# EAGLE board Board (EAGLE 9.7.0)
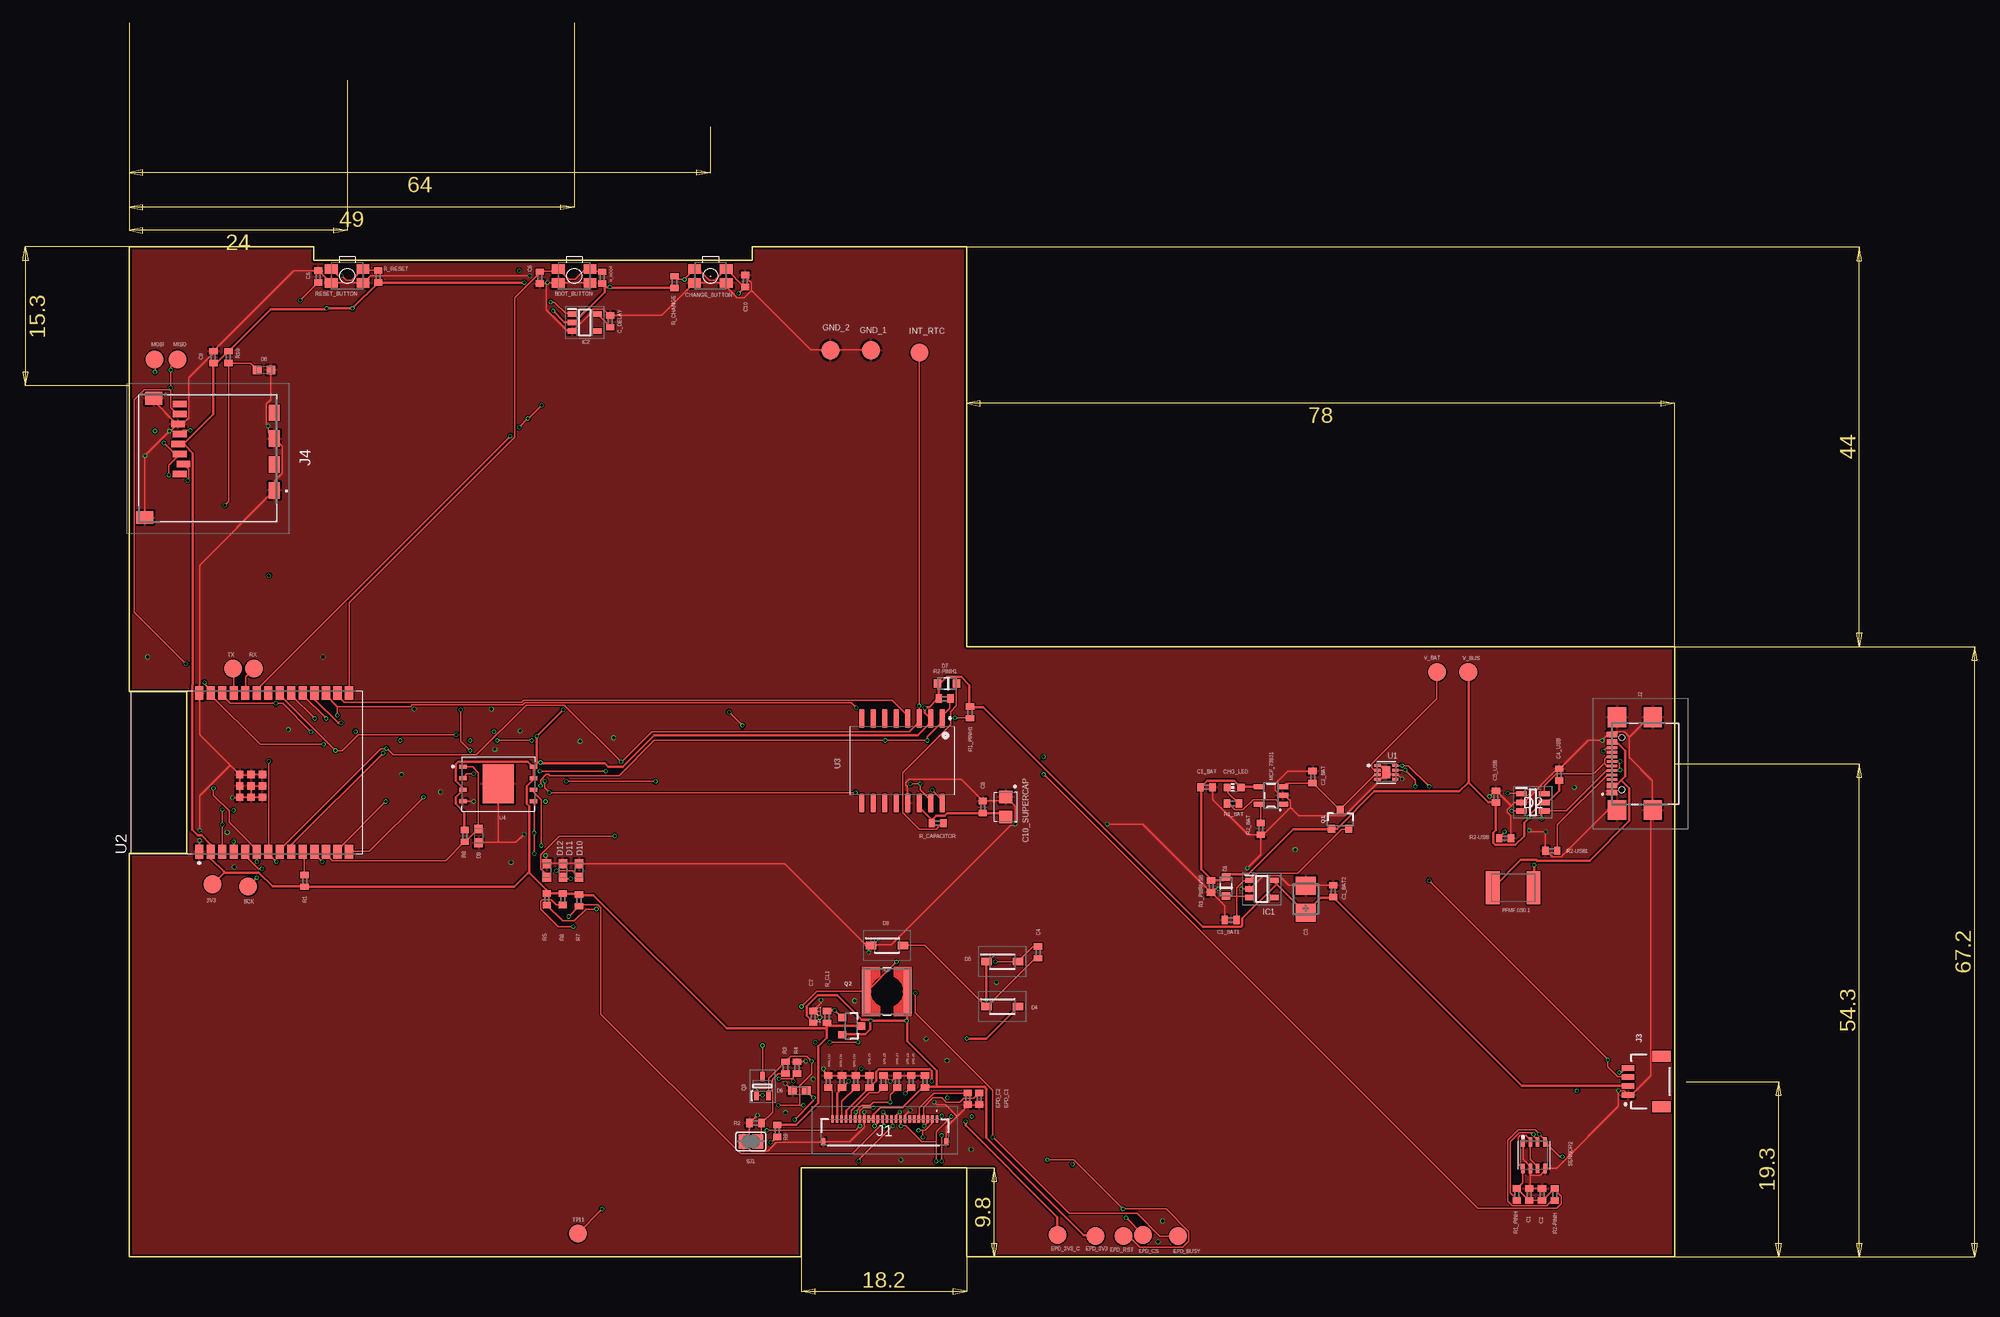
[diagram p0: board, top side]
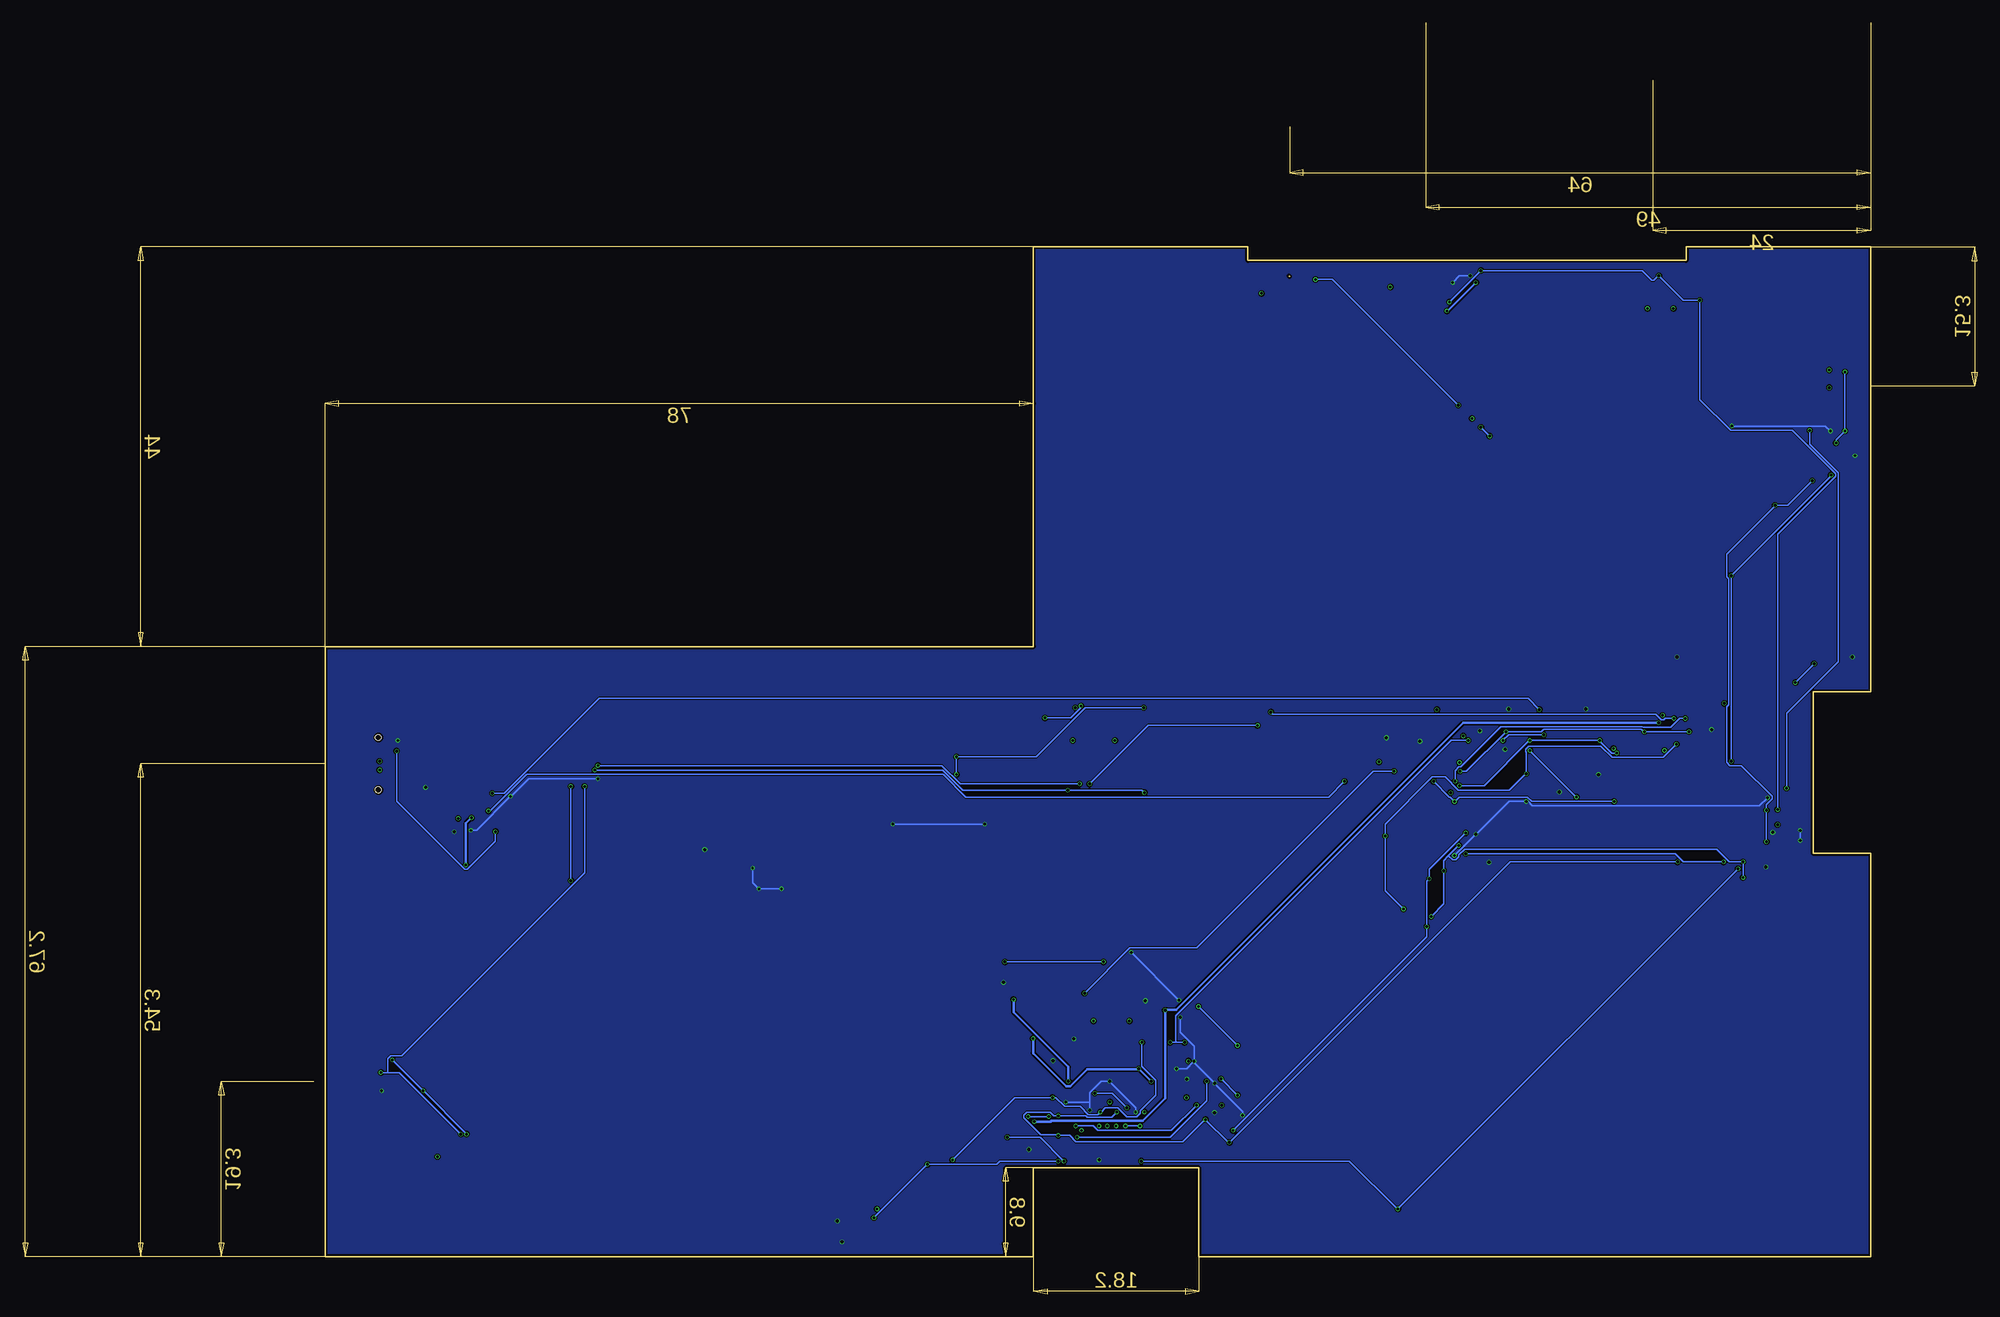
[diagram p1: board, bottom side, seen from below]

Size 170.2 x 111.2 mm. Coordinates in mm from the lower left corner, seen from the top.
Outline: 64.04,107.99 64,107.95
Outline: 6.35,44.45 0,44.45 0,0 74,0 74,9.8 92.2,9.8 92.2,0 170.2,0 170.2,67.2 92.2,67.2 92.2,111.2 68.58,111.2 68.58,109.72 20.32,109.72 20.32,111.2 0,111.2 0,62.23 6.35,62.23 6.35,44.45
Copper layers (1*16): Top 0.035mm / dielectric 1.6mm / Bottom 0.035mm
Design rules "jlcpcb-2layers.dru *": minimum track width 0.15mm, minimum drill 0.3mm, track to track 5mil, track to pad 5mil, pad to pad 5mil, via to via 5mil, smd to smd 5mil, copper to edge 0.2mm, drill to drill 6mil, minimum pad ring 10mil, minimum via ring 3mil, stop-mask expansion 4mil, vias tented up to drill 0mil, thermal gap 10mil
Net classes: 1 power: width 0.3 mm

## Footprints (pad centres in the part's own frame; a part is rotated, then mirrored left to right if it is on the bottom)
TP20R = smd 2 x 2: TP 0,0
MYBUTTON = smd 1.4 x 1.05: 1 1.75,0.75; 2 -1.75,0.75; 3 -1.75,-0.75; 4 1.75,-0.75
EAGLE-LTSPICE_C0402 = smd 0.7 x 0.9: 1 -0.65,0; 2 0.65,0
RCL_CT3528 = smd 2 x 2.2: + -1.5,0; - 1.5,0
CAPCP3225X100N = smd 1.4 x 1.4: 1 -1.1,0; 2 1.1,0
ADAFRUIT_CHIP-LED0603 = smd 0.8 x 0.8: A 0,-0.75; C 0,0.75
ESP32_WROVER_AVX---SD0805S020S1R0_AVX_SD0805S020S1R0_0 = smd 0.8 x 0.9: 1 -1.05,0; 2 1.05,0
SOT95P280X145-6N = smd 1.2 x 0.6: 1 -1.25,0.95; 2 -1.25,0; 3 -1.25,-0.95; 4 1.25,-0.95; 5 1.25,0; 6 1.25,0.95
SOD3716X135N = smd 1.15 x 0.8: 1 -1.75,0; 2 1.75,0
DIOC1608X36N = smd 0.97 x 0.94: 1 -0.75,0; 2 0.75,0
SOT95P280X120-5N = smd 0.9 x 0.6: 1 -1.4,0.95; 2 -1.4,0; 3 -1.4,-0.95; 4 1.4,-0.95; 5 1.4,0.95
SOT95P280X125-5N = smd 0.9 x 0.6: 1 -1.4,0.95; 2 -1.4,0; 3 -1.4,-0.95; 4 1.4,-0.95; 5 1.4,0.95
FH34SRJ24S05SH99 = smd 0.3 x 0.8: 1 5.75,1.45; 2 5.25,1.45; 3 4.75,1.45; 4 4.25,1.45; 5 3.75,1.45; 6 3.25,1.45; 7 2.75,1.45; 8 2.25,1.45; 9 1.75,1.45; 10 1.25,1.45; 11 0.75,1.45; 12 0.25,1.45; 13 -0.25,1.45; 14 -0.75,1.45; 15 -1.25,1.45; 16 -1.75,1.45; 17 -2.25,1.45; 18 -2.75,1.45; 19 -3.25,1.45; 20 -3.75,1.45; 21 -4.25,1.45; 22 -4.75,1.45; 23 -5.25,1.45; 24 -5.75,1.45 | smd 0.4 x 0.8: MP1 6.75,-1.05; MP2 -6.75,-1.05
SAMACSYS_PARTS_USB4110GFA = smd 0.3 x 1.15: A1 -3.35,3.678; A4 -2.55,3.678; A5 -1.25,3.678; A6 -0.25,3.678; A7 0.25,3.678; A8 1.25,3.678; A9 2.55,3.678; A12 3.35,3.678; B1 3.05,3.678; B4 2.25,3.678; B5 1.75,3.678; B6 0.75,3.678; B7 -0.75,3.678; B8 -1.75,3.678; B9 -2.25,3.678; B12 -3.05,3.678 | smd 2.18 x 2: MP1 -5.11,-0.827; MP2 5.11,-0.827; MP3 -5.11,3.103; MP4 5.11,3.103 | hole 0.65: -2.89,2.603; 2.89,2.603
JST04_1MM_RA = smd 0.6 x 1.35: 1 -1.5,0; 2 -0.5,0; 3 0.5,0; 4 1.5,0 | smd 1.2 x 2: NC1 2.8,-3.675; NC2 -2.8,-3.675
112ATAARR03ATTEND = smd 1.8 x 1.2: G1 10.6,10.4; G2 4.9,10.4; S1 7.75,10.4; S2 2.05,10.4 | smd 1.4 x 1.9: G3 13.6,-3.85; G4 0.45,-2.85 | smd 0.7 x 1.5: P1 8.8,0; P2 7.7,0.4; P3 6.6,0; P4 5.5,-0.2; P5 4.4,0; P6 3.3,-0.2; P7 2.2,0; P8 1.1,0
IND_4828-WE-TPC_WRE = smd 0.889 x 4.826: 1 -2.286,0; 2 2.286,0
ESP32_WROVER_SPARKFUN-IC-POWER_SOT23-5 = smd 0.55 x 1.2: 1 -0.95,-1.3; 2 0,-1.3; 3 0.95,-1.3; 4 0.95,1.3; 5 -0.95,1.3
ESP32C6_VARISTOR_CT/CN1812 = smd 1.5 x 3.6: 1 -2.25,0; 2 2.25,0
ESP32_WROVER_SPARKFUN-DISCRETESEMI_SOT23-3 = smd 0.8 x 0.9: 1 -0.95,-1; 2 0.95,-1; 3 0,1.1
SOT65P210X110-3N = smd 1.05 x 0.5: 1 -1.05,0.65; 2 -1.05,-0.65; 3 1.05,0
ESP32_WROVER_EAGLE-LTSPICE_R0402 = smd 0.7 x 0.9: 1 -0.65,0; 2 0.65,0
ESP32_WROVER_BME680_PSON80P300X300X100-8N = smd 1.016 x 0.5: 1 1.458,1.2; 2 1.458,0.4; 3 1.458,-0.4; 4 1.458,-1.2; 5 -1.458,-1.22; 6 -1.458,-0.4; 7 -1.458,0.4; 8 -1.458,1.2
SJ = smd 1.168 x 1.6: 1 -0.762,0; 2 0.762,0
SON50P200X200X80-9N = smd 0.76 x 0.27: 1 -0.985,0.75; 2 -0.985,0.25; 3 -0.985,-0.25; 4 -0.985,-0.75; 5 0.985,-0.75; 6 0.985,-0.25; 7 0.985,0.25; 8 0.985,0.75 | smd 0.9 x 1.3: 9 0,0
XCVR_ESP32-C6-WROOM-1-N8 = smd 1.5 x 0.9: 1 -8.75,5.26; 2 -8.75,3.99; 3 -8.75,2.72; 4 -8.75,1.45; 5 -8.75,0.18; 6 -8.75,-1.09; 7 -8.75,-2.36; 8 -8.75,-3.63; 9 -8.75,-4.9; 10 -8.75,-6.17; 11 -8.75,-7.44; 12 -8.75,-8.71; 13 -8.75,-9.98; 14 -8.75,-11.25; 15 8.75,-11.25; 16 8.75,-9.98; 17 8.75,-8.71; 18 8.75,-7.44; 19 8.75,-6.17; 20 8.75,-4.9; 21 8.75,-3.63; 22 8.75,-2.36; 23 8.75,-1.09; 24 8.75,0.18; 25 8.75,1.45; 26 8.75,2.72; 27 8.75,3.99; 28 8.75,5.26 | smd 0.8 x 0.8: 29_1 -2.755,0.79; 29_2 -1.505,0.79; 29_3 -0.255,0.79; 29_4 -2.755,-0.46; 29_5 -1.505,-0.46; 29_6 -0.255,-0.46; 29_7 -2.755,-1.71; 29_8 -1.505,-1.71; 29_9 -0.255,-1.71
SOIC127P1032X265-16N = smd 2.05 x 0.59: 1 -4.655,4.445; 2 -4.655,3.175; 3 -4.655,1.905; 4 -4.655,0.635; 5 -4.655,-0.635; 6 -4.655,-1.905; 7 -4.655,-3.175; 8 -4.655,-4.445; 9 4.655,-4.445; 10 4.655,-3.175; 11 4.655,-1.905; 12 4.655,-0.635; 13 4.655,0.635; 14 4.655,1.905; 15 4.655,3.175; 16 4.655,4.445
SON127P600X800X80-9N = smd 0.94 x 0.44: 1 -3.895,1.905; 2 -3.895,0.635; 3 -3.895,-0.635; 4 -3.895,-1.905; 5 3.895,-1.905; 6 3.895,-0.635; 7 3.895,0.635; 8 3.895,1.905 | smd 3.4 x 4.3: 9 0,0

## Placement (x,y rotation side)
3V3  TPTP20R  [TP20R]  9.14,41.02 0 top
BOOT_BUTTON  BUTTON_CUSYOMV1  [MYBUTTON]  49,108 180 top
C1  100nF  [EAGLE-LTSPICE_C0402]  154.18,6.86 90 top
C1_BAT  4.7uF  [EAGLE-LTSPICE_C0402]  118.62,51.69 0 top
C1_BAT1  4.7uF  [EAGLE-LTSPICE_C0402]  121.28,37.08 180 top
C1_BAT2  4.7uF  [EAGLE-LTSPICE_C0402]  132.59,40.26 90 top
C2  100nF  [EAGLE-LTSPICE_C0402]  155.57,6.86 90 top
C2_BAT  4.7uF  [EAGLE-LTSPICE_C0402]  130.3,52.83 90 top
C3  100uF  [RCL_CT3528]  129.54,39.37 90 top
C4  4.7uF/25V  [EAGLE-LTSPICE_C0402]  100.08,33.53 90 top
C4_USB  100nF  [EAGLE-LTSPICE_C0402]  157.48,53.09 90 top
C5  1uF  [EAGLE-LTSPICE_C0402]  20.83,107.95 90 top
C5_USB  4.7uF  [EAGLE-LTSPICE_C0402]  150.5,50.67 90 top
C6  100nF  [EAGLE-LTSPICE_C0402]  45.21,107.81 270 top
C7  10uF  [EAGLE-LTSPICE_C0402]  75.31,26.42 90 top
C8  100nF  [EAGLE-LTSPICE_C0402]  93.98,49.53 90 top
C9  100nF  [EAGLE-LTSPICE_C0402]  9.27,99.06 90 top
C10  100nF  [EAGLE-LTSPICE_C0402]  67.82,107.44 90 top
C10_SUPERCAP  CPH3225A  [CAPCP3225X100N]  96.52,49.53 270 top
C_DELAY  100nF  [EAGLE-LTSPICE_C0402]  52.96,103 90 top
CHANGE_BUTTON  BUTTON_CUSYOMV1  [MYBUTTON]  64,108 180 top
CHG_LED  [ADAFRUIT_CHIP-LED0603]  121.67,51.69 90 top
D1  ESP32_WROVER_AVX---SD0805S020S1R0_AVX_SD0805S020S1R0_0_0AVX_SD0805S020S1R0_0_0  [ESP32_WROVER_AVX---SD0805S020S1R0_AVX_SD0805S020S1R0_0]  120.78,40.77 90 top
D2  USBLC6-2SC6Y  [SOT95P280X145-6N]  154.56,50.04 0 top
D3  MBR0530  [SOD3716X135N]  83.44,34.29 0 top
D4  MBR0530  [SOD3716X135N]  96.14,27.56 0 top
D5  MBR0530  [SOD3716X135N]  96.14,32.51 0 top
D6  PGB1010603MR  [DIOC1608X36N]  73.79,18.29 0 top
D7  ESP32_WROVER_AVX---SD0805S020S1R0_AVX_SD0805S020S1R0_0_0AVX_SD0805S020S1R0_0_0  [ESP32_WROVER_AVX---SD0805S020S1R0_AVX_SD0805S020S1R0_0]  90.04,63.12 180 top
D8  PGB1010603MR  [DIOC1608X36N]  14.86,97.66 180 top
D9  PGB1010603MR  [DIOC1608X36N]  38.48,46.35 90 top
D10  PGB1010603MR  [DIOC1608X36N]  49.53,42.55 270 top
D11  PGB1010603MR  [DIOC1608X36N]  47.75,42.55 270 top
D12  PGB1010603MR  [DIOC1608X36N]  45.97,42.55 270 top
EPD_3V3  TPTP20R  [TP20R]  106.43,2.29 0 top
EPD_3V3_C  TPTP20R  [TP20R]  102.23,2.41 0 top
EPD_BUSY  TPTP20R  [TP20R]  115.46,2.27 0 top
EPD_C1  1uF/50V  [EAGLE-LTSPICE_C0402]  93.6,17.4 270 top
EPD_C2  1uF/50V  [EAGLE-LTSPICE_C0402]  92.33,17.4 270 top
EPD_C5  0.1uF/50V  [EAGLE-LTSPICE_C0402]  87.63,19.3 90 top
EPD_C6  1uF/50V  [EAGLE-LTSPICE_C0402]  86.11,19.3 90 top
EPD_C7  1uF/50V  [EAGLE-LTSPICE_C0402]  84.58,19.3 90 top
EPD_C8  1uF/50V  [EAGLE-LTSPICE_C0402]  83.06,19.3 90 top
EPD_C9  1uF/50V  [EAGLE-LTSPICE_C0402]  81.52,19.3 90 top
EPD_C10  1uF/50V  [EAGLE-LTSPICE_C0402]  79.99,19.3 90 top
EPD_C11  1uF/50V  [EAGLE-LTSPICE_C0402]  78.49,19.3 90 top
EPD_C12  1uF/50V  [EAGLE-LTSPICE_C0402]  76.96,19.3 90 top
EPD_CS  TPTP20R  [TP20R]  111.63,2.41 0 top
EPD_RST  TPTP20R  [TP20R]  109.47,2.29 0 top
GND_1  TPTP20R  [TP20R]  81.66,99.82 180 top
GND_2  TPTP20R  [TP20R]  77.22,99.82 0 top
IC1  XC6220A331MR-G  [SOT95P280X120-5N]  124.71,40.51 0 top
IC2  BD5229G-TR  [SOT95P280X125-5N]  50.16,102.87 0 top
INT_RTC  TPTP20R  [TP20R]  87,99.57 0 top
J1  FH34SRJ-24S-0.5SH_99_  [FH34SRJ24S05SH99]  83.19,13.72 0 top
J2  SAMACSYS_PARTS_USB4110-GF-ACPLM  [SAMACSYS_PARTS_USB4110GFA]  166.94,54.3 90 top
J3  QWIIC_RIGHT_ANGLE  [JST04_1MM_RA]  165.05,19.3 90 top
J4  112A-TAAR-R03_ATTEND  [112ATAARR03ATTEND]  5.56,95 270 top
L1  68uH  [IND_4828-WE-TPC_WRE]  83.44,29.21 0 top
MCP_73831  ESP32_WROVER_SPARKFUN-IC-POWER_MCP73831  [ESP32_WROVER_SPARKFUN-IC-POWER_SOT23-5]  125.73,50.8 90 top
MISO  TPTP20R  [TP20R]  5.33,98.81 0 top
MOSI  TPTP20R  [TP20R]  2.79,98.81 0 top
PFMF.050.1  ESP32C6_VARISTORCN1812  [ESP32C6_VARISTOR_CT/CN1812]  152.4,40.64 0 top
Q1  20V/4.2A/52mΩ/1.4W  [ESP32_WROVER_SPARKFUN-DISCRETESEMI_SOT23-3]  133.35,48.13 0 top
Q2  20V/4.2A/52mΩ/1.4W  [ESP32_WROVER_SPARKFUN-DISCRETESEMI_SOT23-3]  79.5,25.4 270 top
Q3  SI1308EDL-T1-GE3  [SOT65P210X110-3N]  69.72,18.8 90 top
R1  10K  [ESP32_WROVER_EAGLE-LTSPICE_R0402]  19.3,41.4 90 top
R1_BAT  200  [ESP32_WROVER_EAGLE-LTSPICE_R0402]  121.54,49.91 0 top
R1_PINH  10K  [ESP32_WROVER_EAGLE-LTSPICE_R0402]  152.78,6.86 90 top
R1_PINH1  10K  [ESP32_WROVER_EAGLE-LTSPICE_R0402]  92.58,59.94 90 top
R1_PWRUSB  100K  [ESP32_WROVER_EAGLE-LTSPICE_R0402]  119.13,40.77 90 top
R2  2.2  [ESP32_WROVER_EAGLE-LTSPICE_R0402]  68.96,14.73 0 top
R2-PINH  10K  [ESP32_WROVER_EAGLE-LTSPICE_R0402]  156.97,6.86 90 top
R2-PINH1  10K  [ESP32_WROVER_EAGLE-LTSPICE_R0402]  89.79,61.47 180 top
R2-USB  5K1  [ESP32_WROVER_EAGLE-LTSPICE_R0402]  151.51,46.1 0 top
R2-USB1  5K1  [ESP32_WROVER_EAGLE-LTSPICE_R0402]  156.59,44.7 0 top
R2_BAT  2K  [ESP32_WROVER_EAGLE-LTSPICE_R0402]  124.59,47.12 90 top
R3  0.47  [ESP32_WROVER_EAGLE-LTSPICE_R0402]  72.26,20.83 270 top
R4  10K  [ESP32_WROVER_EAGLE-LTSPICE_R0402]  73.53,20.83 90 top
R5  10K  [ESP32_WROVER_EAGLE-LTSPICE_R0402]  45.97,39.37 90 top
R6  10K  [ESP32_WROVER_EAGLE-LTSPICE_R0402]  47.75,39.37 90 top
R7  10K  [ESP32_WROVER_EAGLE-LTSPICE_R0402]  49.53,39.24 90 top
R8  10K  [ESP32_WROVER_EAGLE-LTSPICE_R0402]  36.96,46.35 90 top
R9  10K  [ESP32_WROVER_EAGLE-LTSPICE_R0402]  71.37,13.84 90 top
R10  10K  [ESP32_WROVER_EAGLE-LTSPICE_R0402]  10.92,99.06 90 top
R_BOOT  10K  [ESP32_WROVER_EAGLE-LTSPICE_R0402]  52.07,107.82 90 top
R_CAPACITOR  15  [ESP32_WROVER_EAGLE-LTSPICE_R0402]  89.03,47.75 0 top
R_CHANGE  10K  [ESP32_WROVER_EAGLE-LTSPICE_R0402]  60.04,107.31 90 top
R_CL1  10K  [ESP32_WROVER_EAGLE-LTSPICE_R0402]  76.83,26.42 90 top
R_RESET  10K  [ESP32_WROVER_EAGLE-LTSPICE_R0402]  27.43,107.95 90 top
RESET_BUTTON  BUTTON_CUSYOMV1  [MYBUTTON]  24,108 180 top
RX  TPTP20R  [TP20R]  13.72,64.77 0 top
SCK  TPTP20R  [TP20R]  13.08,40.77 0 top
SENSOR2  ESP32_WROVER_BME680_BME680  [ESP32_WROVER_BME680_PSON80P300X300X100-8N]  154.69,11.18 90 top
SJ1  [SJ]  68.45,12.7 0 top
TP11  TPTP20R  [TP20R]  49.4,2.54 0 top
TX  TPTP20R  [TP20R]  11.43,64.77 0 top
U1  MAX17048G+T10  [SON50P200X200X80-9N]  138.43,53.34 0 top
U2  ESP32-C6-WROOM-1-N8  [XCVR_ESP32-C6-WROOM-1-N8]  12.95,53.35 90 top
U3  DS3231SN#  [SOIC127P1032X265-16N]  85.09,54.61 270 top
U4  W25Q512JVEIQ  [SON127P600X800X80-9N]  40.64,52.07 0 top
V_BAT  TPTP20R  [TP20R]  144.02,64.39 180 top
V_BUS  TPTP20R  [TP20R]  147.45,64.39 0 top

## Library data of the parts
3V3 BOOT_BUTTON CHANGE_BUTTON CHG_LED EPD_3V3 EPD_3V3_C EPD_BUSY EPD_CS EPD_RST GND_1 GND_2 INT_RTC J2 MISO MOSI PFMF.050.1 RESET_BUTTON RX SCK SJ1 TP11 TX V_BAT V_BUS = DeskAssistant v19 v1
C1 C1_BAT C1_BAT1 C1_BAT2 C2 C2_BAT C4 C4_USB C5 C5_USB C6-C10 C_DELAY EPD_C1 EPD_C2 EPD_C5-EPD_C12 = DeskAssistant v19 v1; SPICEMODEL: NONE; SPICEPREFIX: C
C3 = DeskAssistant v19 v1; SPICEPREFIX: C
C10_SUPERCAP = DeskAssistant v19 v1; AVAILABILITY: Not in stock; CHECK_PRICES: https://www.snapeda.com/parts/CPH3225A/Seiko+Instruments/view-part/?ref=eda; DESCRIPTION: 11 mF (EDLC) Supercapacitor 3.3 V 1210 (3225 Metric) - -; MF: Seiko Instruments; MP: CPH3225A; PACKAGE: 1210 Seiko; PRICE: None; PURCHASE-URL: https://www.snapeda.com/api/url_track_click_mouser/?unipart_id=562593&manufacturer=Seiko Instruments&part_name=CPH3225A&search_term=None; SNAPEDA_LINK: https://www.snapeda.com/parts/CPH3225A/Seiko+Instruments/view-part/?ref=snap
D1 D7 = DeskAssistant v19 v1; CENTROID_NOT_SPECIFIED: No; DATASHEET: http://datasheets.avx.com/schottky.pdf; DIGIKEY_DESCRIPTION: DIODE SCHOTTKY 20V 1A 0805; DIGIKEY_PART_NUMBER: 478-7800-1-ND; LEAD_FREE: yes; MF: AVX; MOUSER_PART_NUMBER: 581-SD0805S020S1R0; PACKAGE: 0805 (2012 metric); PREFIX: D; ROHS: yes; TEMPERATURE_RANGE_HIGH: +125°C; TEMPERATURE_RANGE_LOW: -55°C
D2 = DeskAssistant v19 v1; AVAILABILITY: In Stock; CHECK_PRICES: https://www.snapeda.com/parts/USBLC6-2SC6Y/STMicroelectronics/view-part/?ref=eda; DESCRIPTION: 17V Clamp 5A (8/20µs) Ipp Tvs Diode Surface Mount SOT-23-6; MF: STMicroelectronics; MP: USBLC6-2SC6Y; PACKAGE: SOT-23-6 STMicroelectronics; PRICE: None; SNAPEDA_LINK: https://www.snapeda.com/parts/USBLC6-2SC6Y/STMicroelectronics/view-part/?ref=snap
D3-D5 = DeskAssistant v19 v1; AVAILABILITY: In Stock; CHECK_PRICES: https://www.snapeda.com/parts/MBR0530/Onsemi/view-part/?ref=eda; DESCRIPTION: Diode Schottky 30 V 500mA Surface Mount SOD-123; MF: ON Semiconductor; MP: MBR0530; PACKAGE: SOD-123-2 ON Semiconductor; PRICE: None; PURCHASE-URL: https://www.snapeda.com/api/url_track_click_mouser/?unipart_id=179458&manufacturer=ON Semiconductor&part_name=MBR0530&search_term=None; SNAPEDA_LINK: https://www.snapeda.com/parts/MBR0530/Onsemi/view-part/?ref=snap
D6 D8-D12 = DeskAssistant v19 v1; AVAILABILITY: In Stock; CHECK_PRICES: https://www.snapeda.com/parts/PGB1010603MR/Littelfuse/view-part/?ref=eda; DESCRIPTION: 150V (Typ) Clamp - Ipp Tvs Diode Surface Mount 0603 (1608 Metric); MF: Littelfuse Inc.; MP: PGB1010603MR; PACKAGE: 0603 Littelfuse Inc.; PRICE: None; PURCHASE-URL: https://www.snapeda.com/api/url_track_click_mouser/?unipart_id=5659453&manufacturer=Littelfuse Inc.&part_name=PGB1010603MR&search_term=None; SNAPEDA_LINK: https://www.snapeda.com/parts/PGB1010603MR/Littelfuse/view-part/?ref=snap
IC1 = DeskAssistant v19 v1; DESCRIPTION: LDO Voltage Regulators; HEIGHT: 1.2mm; MANUFACTURER_NAME: Torex; MANUFACTURER_PART_NUMBER: XC6220A331MR-G; MOUSER_PART_NUMBER: 865-XC6220A331MR-G; MOUSER_PRICE-STOCK: https://www.mouser.co.uk/ProductDetail/Torex-Semiconductor/XC6220A331MR-G?qs=AsjdqWjXhJ8ZSWznL1J0gg%3D%3D
IC2 = DeskAssistant v19 v1; DESCRIPTION: Voltage Detector with Adjustable Delay Time: CMOS processes are utilized to develop high precision, low current consumption CMOS reset ICs that allow arbitrary setting of the delay time. The extensive lineup includes both Nch Open Drain and CMOS output types in a wide range of detection voltages (from 2.3V to 6.0V, in 0.1V steps), enabling selection of the ideal solution based on customer requirements. In addition, the entire series is of course both lead-free and RoHS-compliant.; HEIGHT: 1.25mm; MANUFACTURER_NAME: ROHM Semiconductor; MANUFACTURER_PART_NUMBER: BD5229G-TR; MOUSER_PART_NUMBER: 755-BD5229G-TR; MOUSER_PRICE-STOCK: https://www.mouser.co.uk/ProductDetail/ROHM-Semiconductor/BD5229G-TR?qs=4kLU8WoGk0vvnhrrYwdszw%3D%3D
J1 = DeskAssistant v19 v1; DESCRIPTION: 24 Position FFC, FPC Connector Contacts, Top and Bottom 0.020" (0.50mm) Surface Mount, Right Angle; HEIGHT: 1.1mm; MANUFACTURER_NAME: Hirose; MANUFACTURER_PART_NUMBER: FH34SRJ-24S-0.5SH(99); MOUSER_PART_NUMBER: 798-FH34SRJ24S05SH99; MOUSER_PRICE-STOCK: https://www.mouser.co.uk/ProductDetail/Hirose-Connector/FH34SRJ-24S-0.5SH99?qs=vcbW%252B4%252BSTIpKBl5ap9J8Fw%3D%3D
J3 = DeskAssistant v19 v1; PROD_ID: CONN-13694
J4 = DeskAssistant v19 v1; DESCRIPTION: Micro SD Card Socket, Push-Push Type, Top Mount, SMT, H=1.83mm, 10u; HEIGHT: 1.9mm; MANUFACTURER_NAME: ATTEND; MANUFACTURER_PART_NUMBER: 112A-TAAR-R03 ATTEND
L1 = DeskAssistant v19 v1; COPYRIGHT: Copyright (C) 2024 Ultra Librarian. All rights reserved.; MANUFACTURER_PART_NUMBER: 744043680; MFR_NAME: Wurth Electronics
MCP_73831 = DeskAssistant v19 v1; PROD_ID: IC-09995
Q1 Q2 = DeskAssistant v19 v1; PROD_ID: TRAN-14388
Q3 = DeskAssistant v19 v1; AVAILABILITY: In Stock; CHECK_PRICES: https://www.snapeda.com/parts/SI1308EDL-T1-GE3/Vishay+Siliconix/view-part/?ref=eda; DESCRIPTION: Si1308EDL-T1-GE3 N-channel MOSFET Transistor, 1.5 A, 30 V, 3-Pin SC-70 | Siliconix / Vishay SI1308EDL-T1-GE3; MF: Vishay Siliconix; MP: SI1308EDL-T1-GE3; PACKAGE: SOT-323 Vishay Semiconductor; PRICE: None; PURCHASE-URL: https://www.snapeda.com/api/url_track_click_mouser/?unipart_id=274603&manufacturer=Vishay Siliconix&part_name=SI1308EDL-T1-GE3&search_term=None; SNAPEDA_LINK: https://www.snapeda.com/parts/SI1308EDL-T1-GE3/Vishay+Siliconix/view-part/?ref=snap
R1 R1_BAT R1_PINH R1_PINH1 R1_PWRUSB R2 R2-PINH R2-PINH1 R2-USB R2-USB1 R2_BAT R3-R10 R_BOOT R_CAPACITOR R_CHANGE R_CL1 R_RESET = DeskAssistant v19 v1; SPICEMODEL: NONE; SPICEPREFIX: R
SENSOR2 = DeskAssistant v19 v1; AVAILABILITY: Unavailable; DESCRIPTION: Integrated Environmental Unit; MF: Bosch Sensortec; MP: BME680; PACKAGE: LGA-8 Bosch Tools; PRICE: None
U1 = DeskAssistant v19 v1; AVAILABILITY: In Stock; CHECK_PRICES: https://www.snapeda.com/parts/MAX17048G+T10/Analog+Devices/view-part/?ref=eda; DESCRIPTION: 3µA 1-Cell/2-Cell Fuel Gauge with ModelGauge; MF: Analog Devices; MP: MAX17048G+T10; PACKAGE: TDFN-8 Maxim; PRICE: None; PURCHASE-URL: https://www.snapeda.com/api/url_track_click_mouser/?unipart_id=329239&manufacturer=Analog Devices&part_name=MAX17048G+T10&search_term=None; SNAPEDA_LINK: https://www.snapeda.com/parts/MAX17048G+T10/Analog+Devices/view-part/?ref=snap
U2 = DeskAssistant v19 v1; AVAILABILITY: In Stock; CHECK_PRICES: https://www.snapeda.com/parts/ESP32-C6-WROOM-1-N8/Espressif+Systems/view-part/?ref=eda; DESCRIPTION: Multiprotocol Modules ESP32-C6 module, Wi-Fi 6 in 2.4 GHz band, Bluetooth 5, Zigbee 3.0 and Thread. ESP34-WROOM Compatible - ENGINEERING SAMPLE; MF: Espressif Systems; MP: ESP32-C6-WROOM-1-N8; PACKAGE: None; PRICE: None; SNAPEDA_LINK: https://www.snapeda.com/parts/ESP32-C6-WROOM-1-N8/Espressif+Systems/view-part/?ref=snap
U3 = DeskAssistant v19 v1; AVAILABILITY: In Stock; CHECK_PRICES: https://www.snapeda.com/parts/DS3231SN%23/Analog+Devices/view-part/?ref=eda; DESCRIPTION: Extremely Accurate I²C-Integrated RTC/TCXO/Crystal; MF: Analog Devices; MP: DS3231SN#; PACKAGE: SOIC-16 Maxim; PRICE: None; PURCHASE-URL: https://www.snapeda.com/api/url_track_click_mouser/?unipart_id=99048&manufacturer=Analog Devices&part_name=DS3231SN#&search_term=None; SNAPEDA_LINK: https://www.snapeda.com/parts/DS3231SN%23/Analog+Devices/view-part/?ref=snap
U4 = DeskAssistant v19 v1; AVAILABILITY: In Stock; CHECK_PRICES: https://www.snapeda.com/parts/W25Q512JVEIQ/Winbond+Electronics/view-part/?ref=eda; DESCRIPTION: FLASH - NOR Memory IC 512Mb (64M x 8) SPI - Quad I/O 133 MHz 8-WSON (8x6); MF: Winbond Electronics; MP: W25Q512JVEIQ; PACKAGE: Package; PRICE: None; SNAPEDA_LINK: https://www.snapeda.com/parts/W25Q512JVEIQ/Winbond+Electronics/view-part/?ref=snap

## Nets
3V3 [power]: 3V3.TP C1_BAT2.1 C3.+ C9.1 D7.2 IC1.5 IC2.2 J3.2 J4.P4 Q2.3 R1.1 R1_PINH1.2 R2-PINH1.2 R5.2 R6.2 R7.2 R8.2 R9.2 R10.2 R_BOOT.1 R_CHANGE.1 R_CL1.1 R_RESET.1 U2.2 U3.2 U4.3 U4.7 U4.8
32KHZ: R2-PINH1.1 U2.9 U3.1
DN: D2.4 J2.A7 J2.B7
DP: D2.6 J2.A6 J2.B6
EPD_3V3 [power]: C7.1 EPD_3V3.TP EPD_C5.1 J1.15 J1.16 L1.2 Q2.2
EPD_3V3_C [power]: EPD_3V3_C.TP Q2.1 R_CL1.2 U2.18
EPD_BUSY: EPD_BUSY.TP J1.9 U2.26
EPD_CS: D6.2 EPD_CS.TP J1.12 R9.1 U2.11
EPD_DC: J1.11 TP11.TP U2.5
EPD_RST: EPD_RST.TP J1.10 U2.21
FLASH_CS: D9.2 R8.1 U2.12 U4.1
GDR: J1.2 Q3.1 R4.1
GND: BOOT_BUTTON.1 BOOT_BUTTON.2 C1.2 C1_BAT1.2 C1_BAT2.2 C1_BAT.2 C2.2 C2_BAT.2 C3.- C4_USB.2 C5.2 C5_USB.2 C6.2 C7.2 C8.2 C9.2 C10.2 C10_SUPERCAP.1 C_DELAY.2 CHANGE_BUTTON.1 CHANGE_BUTTON.2 D2.2 D3.1 D6.1 D8.1 D9.1 D10.1 D11.1 D12.1 EPD_C1.2 EPD_C2.2 EPD_C5.2 EPD_C6.2 EPD_C7.2 EPD_C8.2 EPD_C9.2 EPD_C10.2 EPD_C11.2 EPD_C12.2 GND_1.TP GND_2.TP IC1.2 IC2.3 J1.8 J1.17 J1.MP1 J1.MP2 J2.A1 J2.A12 J2.B1 J2.B12 J2.MP1 J2.MP2 J2.MP3 J2.MP4 J3.1 J4.G1 J4.G2 J4.G3 J4.G4 J4.P6 MCP_73831.2 R1_PWRUSB.1 R2-USB1.1 R2-USB.2 R2.1 R2_BAT.1 R4.2 RESET_BUTTON.1 RESET_BUTTON.2 SENSOR2.1 SENSOR2.5 SENSOR2.7 SJ1.1 U1.1 U1.4 U1.6 U1.9 U2.1 U2.28 U2.29_1 U2.29_2 U2.29_3 U2.29_4 U2.29_5 U2.29_6 U2.29_7 U2.29_8 U2.29_9 U3.13 U4.4 U4.9
GPIO8: R1.2 U2.10
I2C_PW: C1.1 C2.1 R1_PINH.2 R2-PINH.2 SENSOR2.2 SENSOR2.6 SENSOR2.8 U2.17
INT_RTC: INT_RTC.TP R1_PINH1.1 U2.8 U3.3
IO/BOOT: BOOT_BUTTON.3 BOOT_BUTTON.4 C6.1 R_BOOT.2 U2.15
IO/CHANGE: C10.1 CHANGE_BUTTON.3 CHANGE_BUTTON.4 R_CHANGE.2 U2.23
MISO: D12.2 J4.P7 MISO.TP R5.1 U2.27 U4.2
MOSI: D11.2 J1.14 J4.P3 MOSI.TP R6.1 U2.7 U4.5
N$1: C1_BAT1.1 D1.1 IC1.1 IC1.3 Q1.2
N$2: MCP_73831.1 R1_BAT.1
N$3: CHG_LED.C R1_BAT.2
N$4: MCP_73831.5 R2_BAT.2
N$5: C_DELAY.1 IC2.5
N$6: J2.A5 R2-USB1.2
N$7: J2.B5 R2-USB.1
N$8: C4.1 D3.2 D4.1
N$9: EPD_C2.1 J1.5
N$10: EPD_C12.1 J1.24
N$11: EPD_C1.1 J1.4
N$12: D7.1 R_CAPACITOR.2
N$13: EPD_C10.1 J1.22
N$15: EPD_C8.1 J1.20
N$16: EPD_C7.1 J1.19
N$17: EPD_C6.1 J1.18
PREVGH [power]: D5.1 EPD_C9.1 J1.21
PREVGL [power]: D4.2 EPD_C11.1 J1.23
RESE: J1.3 Q3.2 R3.1
RESE': R2.2 R3.2 SJ1.2
RESET: C5.1 IC2.1 R_RESET.2 RESET_BUTTON.3 RESET_BUTTON.4 U2.3
RTC_RST: U2.16 U3.4
RX: RX.TP U2.24
SCK: D10.2 J1.13 J4.P5 R7.1 SCK.TP U2.6 U4.6
SCL: J3.4 R2-PINH.1 SENSOR2.4 U1.7 U2.20 U3.16
SDA: J3.3 R1_PINH.1 SENSOR2.3 U1.8 U2.19 U3.15
SRC: C4.2 D5.2 L1.1 Q3.3
SS_SD: D8.2 J4.P2 R10.1 U2.4
TX: TX.TP U2.25
USB_D+: D2.1 U2.14
USB_D-: D2.3 U2.13
VBAT: C2_BAT.1 MCP_73831.3 Q1.3 U1.2 U1.3 V_BAT.TP
VBUS [power]: C1_BAT.1 C4_USB.1 C5_USB.1 CHG_LED.A D1.2 D2.5 MCP_73831.4 PFMF.050.1.2 Q1.1 R1_PWRUSB.2 V_BUS.TP
VRTC [power]: C8.1 C10_SUPERCAP.2 R_CAPACITOR.1 U3.14
VUSB [power]: J2.A4 J2.A9 J2.B4 J2.B9 PFMF.050.1.1

## Tracks (layer width: path | path; a pad name or v marks a point on that pad's centre or on a via)
3V3  (via drill 0.3)
  Top 0.3: 52.42,106.78 v52.91,106.78 53.05,106.71 60.04,106.71 R_CHANGE.1 | 52.42,106.78 52.08,107.13 R_BOOT.1 | v46.67,104.15 47.92,102.91 48.75,102.91 IC2.2 48.89,102.97 49.1,102.97 52.35,106.23 52.35,106.64 52.42,106.78 | v43.49,107.27 27.56,107.27 R_RESET.1 27.42,107.27 v24.58,104.43 v21.74,104.43 21.61,104.36 15.58,104.36 11.01,99.79 R10.2 10.87,99.65 9.7,98.47 9.28,98.47 C9.1 9.28,98.27 9.28,92.8 6.03,89.54 5.4,89.54 J4.P4 6.09,89.4 6.99,88.5 6.99,63.02 6.92,62.95 6.92,47.02 7.55,46.4 7.96,46.4 8.93,45.43 8.93,44.74 U2.2 9,44.6 9,43.84 10.39,42.45 10.46,42.31 | 126.35,41.03 129.5,37.88 C3.+ 129.64,37.95 131.23,39.54 132.54,39.54 C1_BAT2.1 132.68,39.47 153.32,18.84 165.02,18.84 J3.2 | 126.35,41.03 126.17,41.2 126.17,41.41 IC1.5 | 76.8,25.41 76.8,25.76 R_CL1.1 | 76.8,25.41 76.8,25.14 | 76.8,25.14 76.8,24.1 75.9,23.2 75.9,16.97 73.47,14.54 71.4,14.54 R9.2 | 76.8,25.41 80.54,25.41 Q2.3 | 10.46,42.31 14.27,42.31 15.79,40.79 19.25,40.79 R1.1 19.46,40.72 42.38,40.72 43.9,42.24 44.04,42.31 | 10.46,42.31 9.21,41.06 3V3.TP | R8.2 36.91,47.02 36.91,48.89 35.94,49.86 35.94,50.62 36.7,51.38 U4.3 36.63,51.52 36.63,51.73 35.94,52.42 35.94,54.22 36.22,54.5 43.9,54.5 44.39,54.02 U4.8 | 45.01,54.43 v45.29,54.43 45.43,54.36 52.35,54.36 52.77,53.95 54.36,53.95 57.82,57.41 86.84,57.41 88.16,58.72 88.16,59.14 U3.2 88.22,59.28 87.6,59.9 v87.6,60.45 87.74,60.52 88.09,60.52 88.99,61.42 R2-PINH1.2 89.12,61.49 89.12,63.02 89.06,63.09 D7.2 89.26,63.09 90.03,63.85 91.62,63.85 92.52,62.95 92.52,60.66 R1_PINH1.2 92.73,60.52 94.04,60.52 118.21,36.36 122.43,36.36 122.57,36.49 122.57,37.26 126.35,41.03
  Top 0.3: 45.01,54.43 44.6,54.02 U4.8 | 45.01,54.43 44.87,54.5 v44.87,57.34 v47.78,60.25 | U4.8 44.53,53.88 44.53,52.77 U4.7 44.53,52.56 43.77,51.8 43.77,49.86 44.04,49.58 44.04,42.31 | 44.04,42.31 45.91,40.44 45.91,40.16 R5.2 45.98,40.03 47.71,40.03 R6.2 47.85,39.96 49.51,39.96 R7.2 49.65,39.82 51.11,39.82 65.79,25.14 76.8,25.14
  Bottom 0.3: v43.49,107.27 46.6,104.15 v46.67,104.15
32KHZ  (via drill 0.3)
  Top 0.15: R2-PINH1.1 90.37,61.42 90.37,60.39 89.54,59.55 U3.1 89.47,59.21 89.47,58.86 87.88,57.27 v87.88,56.85 v83.24,56.85 57.82,56.85 53.95,52.98 46.33,52.98 46.19,53.12 45.91,53.12 45.29,52.49 v45.29,51.87 | v27.98,55.47 17.87,45.36 17.87,44.67 U2.9
  Bottom 0.15: v45.29,51.87 42.59,51.87 37.6,56.85 v37.53,56.85 v29.85,56.85 29.85,56.78 28.53,55.47 v27.98,55.47
DN  (via drill 0.3)
  Top 0.15: v155.54,48.27 155.54,48.82 155.74,49.03 D2.4 155.88,49.1 158.24,49.1 162.67,53.53 163.22,53.53 J2.B7 163.29,53.6 v164.19,53.6 164.05,53.67 164.05,54.5 v164.19,54.57 163.29,54.57 J2.A7
DP
  Top 0.15: 162.46,54.29 162.67,54.08 163.22,54.08 J2.A6 | 162.46,54.29 162.46,54.78 162.67,54.98 163.22,54.98 J2.B6 | D2.6 155.81,51.04 155.81,51.87 157.13,53.18 161.28,53.18 162.39,54.29 162.46,54.29
EPD_3V3  (via drill 0.3)
  Top 0.3: v85.59,25.97 v81.65,25.97 | Q2.2 78.53,24.52 81.02,24.52 81.58,25.07 81.58,25.83 v81.65,25.97 | C7.1 75.28,25.83 74.58,26.52 74.58,27.56 75.83,28.81 77.97,28.81 80.68,26.11 81.58,26.11 v81.65,25.97 | L1.2 85.66,29.15 85.66,26.11 v85.59,25.97 | J1.16 81.92,15.17 J1.15 81.99,15.3 81.99,15.72 82.75,16.48 85.18,16.48 87.32,18.63 87.6,18.63 EPD_C5.1 87.74,18.7 88.92,18.7 | 88.92,18.7 94.18,18.7 94.39,18.49 94.39,13.09 105.12,2.35 106.37,2.35 EPD_3V3.TP | 88.92,18.7 88.92,20.5 85.66,23.75 85.66,25.83 v85.59,25.97
EPD_3V3_C  (via drill 0.3)
  Top 0.3: v23.34,58.79 22.99,58.79 20.43,61.35 20.43,62.05 U2.18 | R_CL1.2 76.87,27.08 76.94,27.15 v77.7,27.15 78.46,26.38 Q2.1 | v92.1,14.89 92.1,14.47 102.21,4.36 102.21,2.42 EPD_3V3_C.TP
  Bottom 0.3: v92.1,14.89 90.3,14.89 90.23,14.96 80.19,14.96 77.7,17.45 v77.7,27.15 77.56,27.21 76.45,27.21 44.87,58.79 v23.34,58.79
EPD_BUSY  (via drill 0.3)
  Top 0.15: v45.22,53.46 v52.49,53.46 | v20.01,57.82 16.9,60.94 v16.14,60.94 11.15,60.94 10.25,61.84 10.25,62.05 U2.26 | J1.9 84.97,15.17 v84.97,14.4 85.52,14.4 87.25,12.67 88.85,12.67 | 88.85,12.67 88.85,13.78 v90.51,15.44 | 88.85,12.67 v88.85,10.53 | v86.56,29.02 86.56,26.87 95.08,18.35 v95.08,13.16 95.15,13.16 103.53,4.78 111.01,4.78 113.5,2.29 115.44,2.29 EPD_BUSY.TP
  Bottom 0.15: v45.22,53.46 44.53,53.46 v40.16,57.82 36.29,57.82 36.01,58.1 25.28,58.1 25,57.82 v24.93,57.82 v20.01,57.82 | v90.51,15.44 v92.8,15.44 | v88.85,10.53 91.48,13.16 v95.08,13.16 | v52.49,53.46 54.78,53.46 74.24,34 81.58,34 v86.56,29.02
EPD_CS  (via drill 0.3)
  Top 0.15: v83.03,15.93 83.38,15.58 83.38,15.23 J1.12 | v89.47,13.37 v89.47,10.53 | v109.76,4.29 111.63,2.42 EPD_CS.TP | v21.26,43.49 20.43,44.32 20.43,44.6 U2.11 | v70.64,12.6 70.77,12.6 71.33,13.16 R9.1 | v73.27,15.1 75.34,17.17 v75.34,17.52 74.58,18.28 D6.2
  Bottom 0.15: v83.03,15.93 83.58,15.37 86.28,15.37 86.42,15.51 v89.47,15.51 89.96,15.51 90.37,15.93 92.93,15.93 93.28,15.58 93.28,15.3 91.41,13.43 89.54,13.43 v89.47,13.37 88.22,13.37 87.53,12.67 75.76,12.67 73.34,15.1 v73.27,15.1 70.77,12.6 v70.64,12.6 70.57,12.6 39.68,43.49 v21.26,43.49 | v89.47,10.53 95.91,10.53 96.26,10.18 v103.88,10.18 v109.76,4.29
EPD_DC  (via drill 0.3)
  Top 0.15: v80.33,10.53 80.33,10.66 v84.07,14.4 84,14.4 84,15.17 J1.11 | v14.61,42.73 14.2,42.73 12.81,44.11 12.81,44.6 U2.5 | v52.08,5.26 49.38,2.56 TP11.TP
  Bottom 0.15: v14.61,42.73 v52.08,5.26 52.15,5.26 57.41,10.53 v80.33,10.53
EPD_RST  (via drill 0.3)
  Top 0.15: U2.21 16.62,62.05 16.62,61.84 v22.71,55.75 23.48,55.75 25.21,57.48 v36.01,57.48 | v77.14,23.61 v80.26,23.61 | v84.83,15.93 84.48,15.58 84.48,15.23 J1.10 | v101.11,10.66 104.01,10.66 v109.42,5.26 114.19,5.26 116.69,2.77 116.69,1.73 115.99,1.04 111.28,1.04 110.04,2.29 109.48,2.29 EPD_RST.TP | v44.32,56.85 v40.51,56.85
  Bottom 0.15: v77.14,23.61 76.52,23.61 | 76.52,23.61 v75.55,23.61 | v80.26,23.61 80.26,20.98 78.74,19.46 78.74,17.8 80.47,16.07 80.47,15.79 80.81,15.44 81.92,15.44 82.89,16.41 84.28,16.41 84.76,15.93 v84.83,15.93 85.11,15.65 86.15,15.65 87.05,16.55 88.78,16.55 89.75,17.52 v90.09,17.52 94.25,17.52 v101.11,10.66 | v36.01,57.48 39.89,57.48 v40.51,56.85 | v44.32,56.85 46.19,56.85 76.52,26.52 76.52,23.61
FLASH_CS
  Top 0.15: U4.1 36.77,53.95 37.81,53.95 38.43,53.32 38.43,47.23 D9.2 38.43,47.16 36.98,45.7 R8.1 36.91,45.7 34.83,43.63 22.37,43.63 21.68,44.32 21.68,44.6 U2.12
GDR  (via drill 0.3)
  Top 0.15: 87.39,13.92 87.67,13.92 88.43,14.68 J1.2 | 87.39,13.92 v86.91,13.92 | v69.73,17.8 69.11,17.8 Q3.1 | 73.13,19.6 73.13,19.8 73.47,20.15 R4.1 | 73.13,19.6 v73.13,19.32 | 73.13,19.6 v71.53,19.6 | 87.39,13.92 v87.39,13.16
  Bottom 0.15: v71.53,19.6 v69.73,17.8 | v87.39,13.16 77.14,13.16 73.13,17.17 v73.13,19.32
GND  (via drill 0.3, 0.35)
  Top 0.15: v37.95,50.14 36.77,50.14 U4.4 | v45.84,44.18 45.91,44.11 45.91,43.35 D12.1 45.98,43.35 47.71,43.35 D11.1 47.78,43.35 49.51,43.35 D10.1 49.58,43.28 72.16,43.28 81.37,34.07 D3.1 | 40.65,45.64 42.59,45.64 v43.49,46.54 | 40.65,45.64 38.5,45.64 D9.1 | 40.65,45.64 40.65,52.01 U4.9 | v7.76,45.84 7.76,44.67 U2.1 | U2.29_4 13.43,50.62 13.43,51.8 U2.29_5 13.5,51.8 14.61,51.8 U2.29_8 | U2.29_7 14.61,50.62 13.5,50.62 U2.29_4 | v11.36,50.55 12.12,50.55 U2.29_1 | U2.29_3 12.19,53.05 12.19,51.87 U2.29_2 12.19,51.8 12.19,50.62 U2.29_1 | U2.29_3 12.26,53.05 13.37,53.05 U2.29_6 13.43,53.12 14.61,53.12 U2.29_9 | 11.12,54.12 12.12,53.12 U2.29_3 | 11.12,54.12 7.76,57.48 7.76,62.05 U2.28 7.76,62.12 7.76,76.17 15.93,84.35 J4.G1 16,84.42 16,85.45 16.83,86.28 16.83,89.26 16,90.09 J4.G2 15.93,90.16 15.3,90.79 v15.3,91.48 15.3,91.55 15.1,91.76 15.1,93.9 15.58,94.39 15.58,97.64 D8.1 | U2.29_4 13.37,50.62 12.26,50.62 U2.29_1 | v7.76,46.95 7.76,50.76 11.12,54.12 | v46.05,107.27 45.98,107.2 45.22,107.2 C6.2 | v46.05,107.27 47.23,107.27 BOOT_BUTTON.1 47.3,107.27 50.69,107.27 BOOT_BUTTON.2 | v46.05,107.27 45.91,107.13 45.91,104.29 48.27,101.94 48.75,101.94 IC2.3 48.82,101.94 49.24,102.35 49.31,102.35 50.9,103.94 50.9,104.22 51.04,104.36 52.22,104.36 52.91,103.67 C_DELAY.2 52.98,103.67 58.66,103.67 62.19,107.2 CHANGE_BUTTON.1 62.26,107.27 65.72,107.27 CHANGE_BUTTON.2 65.79,107.2 65.79,106.78 66.97,105.61 67.73,105.61 68.49,106.37 | GND_1.TP 81.65,99.86 77.28,99.86 GND_2.TP 77.21,99.86 75.07,99.86 68.56,106.37 68.49,106.37 | 68.49,106.37 68.49,107.27 67.86,107.89 67.86,108.03 C10.2
  Top 0.15: J4.G3 1.73,81.44 v1.73,88.22 v4.43,90.92 4.5,90.92 5.26,91.69 J4.P6 | J4.P6 5.4,91.76 5.96,91.76 6.58,92.38 6.58,96.81 9.21,99.44 9.21,99.65 C9.2 18.14,108.58 20.77,108.58 C5.2 20.84,108.58 22.23,107.2 RESET_BUTTON.1 22.3,107.27 25.69,107.27 RESET_BUTTON.2 25.76,107.2 26.59,108.03 v44.11,108.03 | J4.G4 2.77,94.53 2.77,94.18 5.19,91.76 5.33,91.76 J4.P6 | C2.2 155.54,7.55 154.22,7.55 C1.2 154.29,7.62 154.29,9 | 154.29,9 154.29,9.7 SENSOR2.7 154.22,9.76 154.22,10.04 153.53,10.73 153.53,12.6 SENSOR2.1 | 154.29,9 155.4,9 155.88,9.49 155.88,9.7 SENSOR2.5 155.95,9.76 157.2,9.76 163.98,16.55 v163.98,18.28 164.61,18.28 165.02,17.87 J3.1 165.09,17.87 165.44,17.87 167.52,19.94 167.52,48.96 167.72,49.17 J2.MP1 167.72,49.24 167.72,52.42 165.16,54.98 165.16,57.27 | 163.29,57.82 163.29,58.86 163.78,59.35 J2.MP4 | 163.29,57.82 163.29,57.69 J2.A12 163.29,57.62 163.29,57.41 J2.B1 163.22,57.34 162.67,57.34 v162.18,56.85 160.66,56.85 157.54,53.74 C4_USB.2 157.47,53.67 157.2,53.67 153.6,50.07 153.32,50.07 D2.2 153.25,50 152.49,50 152.18,49.69 | 165.16,57.27 164.61,57.82 163.29,57.82 | J2.MP2 167.72,59.35 167.31,59.35 165.23,57.27 165.16,57.27 | J2.B12 163.29,51.24 163.29,50.97 J2.A1 163.29,50.9 163.29,49.72 163.78,49.24 J2.MP3 163.29,49.65 157.68,44.04 156.71,44.04 156.02,44.74 R2-USB1.1 155.95,44.74 155.95,46.74 v155.97,46.79 155.95,46.81 154.29,46.81 v154.15,46.95 | v140.16,52.63 139.75,53.05 139.47,53.05 U1.6 139.4,53.12 138.36,53.12 U1.9 | U1.9 138.36,53.32 138.36,53.18 137.81,52.63 137.46,52.63 U1.4 137.39,52.56 137.39,52.08 133.86,48.54 128.81,48.54 127.91,49.44 127.83,49.44
  Top 0.15: U1.1 137.46,54.08 137.74,54.08 138.43,53.39 U1.9 | v149.79,50.69 150.48,51.38 C5_USB.2 150.55,51.31 152.18,49.69 | 152.18,49.69 151.73,49.24 151.73,48.96 152.14,48.54 152.14,46.12 R2-USB.2 | 91.17,15.48 92.38,16.69 EPD_C2.2 92.45,16.69 93.56,16.69 EPD_C1.2 | 91.17,15.48 89.96,14.27 89.96,12.67 J1.MP1 | v80.95,15.93 80.95,15.23 J1.17 80.95,15.1 80.95,14.27 79.36,12.67 76.45,12.67 J1.MP2 76.38,12.6 71.26,12.6 70.29,11.63 68.56,11.63 67.73,12.46 67.73,12.67 SJ1.1 67.73,12.74 68.28,13.3 68.28,14.68 R2.1 68.35,14.75 v69.18,15.58 | v86.01,16.14 85.45,15.58 85.45,15.23 J1.8 | EPD_C8.2 83.1,20.01 v83.79,19.32 83.93,19.32 84.55,19.94 EPD_C7.2 84.62,19.94 86.08,19.94 EPD_C6.2 86.15,19.94 87.6,19.94 EPD_C5.2 | 91.17,15.48 89.89,16.76 88.92,16.76 v88.64,17.04 | v81.44,33.52 81.44,34.07 81.65,34.28 D3.1 | v76.04,26.38 75.34,27.08 C7.2 75.34,27.15 76.17,27.98 v76.17,28.25 | v72.23,19.11 72.99,18.35 D6.1 | v74.51,21.54 73.54,21.54 R4.2 | v76.45,20.71 76.45,20.5 76.94,20.01 EPD_C12.2 77.01,19.94 78.46,19.94 EPD_C11.2 78.53,19.94 EPD_C10.2 80.05,19.94 81.51,19.94 EPD_C9.2 | U3.13 85.66,50 85.66,51.8 85.52,51.94 85.52,52.22 85.87,52.56 91.62,52.56 93.97,50.21 C8.2 94.04,50.21 96.05,50.21 96.47,50.62 C10_SUPERCAP.1 96.53,50.62 97.57,49.58 v97.57,47.64 97.5,47.64 97.36,47.51 97.09,47.51 83.93,34.35 81.72,34.35 D3.1 | C2_BAT.2 130.26,53.46 127.56,53.46 126.17,52.08 126.17,51.38 126.73,50.83 127,50.83 MCP_73831.2 127.07,50.76 127.28,50.76 127.83,50.21 127.83,49.44 | C1_BAT2.2 132.54,40.93 129.57,40.93 C3.- 129.5,40.93 127.7,40.93 126.66,41.97 124.86,41.97 123.33,40.44 IC1.2 123.27,40.51 v122.43,40.51
  Top 0.15: v119.94,40.51 119.53,40.51 119.18,40.16 R1_PWRUSB.1 | C1_BAT1.2 120.63,37.12 120.63,38.64 119.18,40.1 R1_PWRUSB.1 | v123.13,42.8 124.58,44.25 R2_BAT.1 | C1_BAT.2 119.32,51.66 119.32,50.34 123.2,46.47 124.51,46.47 R2_BAT.1 | 127.83,49.44 124.93,46.54 124.65,46.54 R2_BAT.1 | v107.68,47.64 111.63,47.64 119.11,40.16 R1_PWRUSB.1
  Bottom 0.15: v45.84,44.18 v43.49,46.54 43.42,46.54 39.82,50.14 v37.95,50.14 37.74,50.14 37.26,49.65 12.26,49.65 v11.36,50.55 | v7.76,46.95 v7.76,45.84 | v44.11,108.03 45.29,108.03 v46.05,107.27 | v15.3,91.48 4.99,91.48 v4.43,90.92 | v154.15,46.95 153.53,46.95 v149.79,50.69 149.72,50.69 147.78,52.63 v140.16,52.63 | 86.01,17.04 86.01,18.07 84.76,19.32 v83.79,19.32 83.79,19.25 80.95,16.41 v80.95,15.93 | 86.01,17.04 v86.01,16.14 | 86.01,17.04 v88.64,17.04 | v76.17,28.25 v81.44,33.52 | 74.58,21.47 75.34,20.71 v76.45,20.71 | 74.58,21.47 v72.23,19.11 72.23,19.04 69.18,16 v69.18,15.58 | 74.58,21.47 v74.51,21.54 74.51,23.2 76.04,24.72 v76.04,26.38 | v97.57,47.64 v107.68,47.64 | v123.13,42.8 123.13,41.2 v122.43,40.51 v119.94,40.51
  other vias: 2.03,66.04 53.34,57.15 49.66,56.77 43.05,57.91 39.88,60.33 29.97,53.09 21.34,66.04 17.53,58.04 128.4,44.83 113.79,3.94 113.28,1.65 87.76,24 79.88,28.19 84.96,10.67 31.37,60.33 11.56,42.93 10.79,46.74 159.13,51.69 95.5,30.23 72.26,15.88 75.31,19.56 92.71,11.81 34.29,51.18 40.26,55.88 42.04,43.43 90.04,21.59
  pour Top: 228.52,140.79 227.37,139.64 227.35,139.62 -26.59,139.62 -26.59,-13.94 -24.1,-16.43 223.49,-16.43 228.52,-11.4
  pour Bottom: -43.1,-43.2 -43.12,-43.22 -48.08,-48.18 237.46,-48.18 248.84,-36.8 248.84,162.38 234.99,148.53 234.97,148.51 -43.1,148.51
GPIO8
  Top 0.15: R1.2 19.25,42.1 19.25,44.53 19.18,44.6 U2.10
I2C_PW  (via drill 0.3)
  Top 0.15: SENSOR2.6 155.05,9.76 155.05,9.97 154.29,10.73 154.29,12.6 SENSOR2.2 154.22,12.67 154.22,12.95 153.8,13.37 153.18,13.37 152.97,13.16 152.97,10.25 153.46,9.76 SENSOR2.8 153.46,9.7 153.46,8.17 152.84,7.55 R1_PINH.2 152.84,7.48 154.15,6.16 C1.1 154.22,6.23 155.54,6.23 C2.1 155.6,6.16 156.92,7.48 R2-PINH.2 156.92,7.41 157.68,6.65 157.68,5.82 157.2,5.33 148.47,5.33 v100.69,53.12 | 22.92,60.59 v22.92,59.62 | 22.92,60.59 21.68,61.84 21.68,62.05 U2.17 | v80.05,60.45 79.5,61.01 43.56,61.01 43.35,60.8 36.42,60.8 36.4,60.78 31.18,60.78 31,60.59 22.92,60.59
  Bottom 0.15: v80.05,60.45 86.49,60.45 91.89,55.05 v100.69,55.05 v100.69,53.12
INT_RTC  (via drill 0.3)
  Top 0.15: v90.92,59.35 92.52,59.35 R1_PINH1.1 | INT_RTC.TP 86.98,99.51 v86.98,60.66 86.98,59.28 U3.3 86.98,59.21 86.98,58.93 85.87,57.82 57.55,57.82 54.22,54.5 v54.15,54.5 47.92,60.73 43.7,60.73 38.23,55.26 29.09,55.26 28.39,55.95 v28.32,55.95 27.7,55.95 16.62,44.87 16.62,44.67 U2.8
  Bottom 0.15: v90.92,59.35 88.09,59.35 86.98,60.45 v86.98,60.66
IO/BOOT
  Top 0.15: R_BOOT.2 52.01,108.52 50.97,108.52 50.76,108.72 BOOT_BUTTON.3 50.69,108.72 50.21,108.72 49.1,107.61 48.41,107.61 47.3,108.72 BOOT_BUTTON.4 47.23,108.72 47.02,108.52 45.22,108.52 C6.1 45.29,108.44 42.45,105.61 42.45,90.23 24.24,72.02 24.24,62.12 U2.15
IO/CHANGE  (via drill 0.3)
  Top 0.15: R_CHANGE.2 60.11,107.96 60.45,107.61 v61.15,107.61 61.15,107.68 62.19,108.72 CHANGE_BUTTON.4 62.26,108.72 62.67,108.72 63.85,107.55 64.47,107.55 65.72,108.79 CHANGE_BUTTON.3 65.79,108.72 67.73,106.78 C10.1 67.8,106.78 v67.1,106.09 | v42.94,91.34 v43.9,92.31 43.97,92.31 v45.43,93.76 | v41.97,90.37 14.06,62.46 14.06,62.12 U2.23
  Bottom 0.15: v42.94,91.34 v41.97,90.37 | v61.15,107.61 59.28,107.61 v45.43,93.76
MISO  (via drill 0.3)
  Top 0.15: v51.45,38.3 50.34,38.3 49.03,36.98 47.71,36.98 45.98,38.71 R5.1 | v53.46,46.33 47.37,46.33 45.29,44.25 45.29,42.73 45.91,42.1 45.91,41.83 D12.2 | v4.57,95.7 v4.57,97.64 4.57,97.99 5.33,98.75 MISO.TP | v4.57,95.7 4.57,93.49 5.19,92.86 5.54,92.86 J4.P7 | v37.95,53.18 37.19,53.18 36.77,52.77 U4.2 | v21.4,56.44 14.4,56.44 9,61.84 9,62.05 U2.27 8.93,62.12 8.93,62.39 8.31,63.02 v8.31,63.23 | v6.23,65.3 0.55,70.98 0.55,94.39 1.66,95.5 4.5,95.5 v4.57,95.7
  Bottom 0.15: v51.45,38.3 53.46,40.3 v53.46,46.33 53.46,47.64 48.27,52.84 46.88,52.84 45.43,51.38 39.82,51.38 38.02,53.18 v37.95,53.18 37.95,55.54 38.02,55.61 38.02,55.88 37.67,56.23 29.71,56.23 28.46,54.98 22.85,54.98 v21.4,56.44 | v8.31,63.23 v6.23,65.3
MOSI  (via drill 0.3)
  Top 0.15: v16.2,43.49 15.37,44.32 15.37,44.6 U2.7 15.37,44.67 v15.37,54.57 | v2.84,97.44 2.84,98.75 MOSI.TP | v4.36,86.08 4.36,87.19 5.54,88.36 J4.P3 5.26,88.16 v3.81,89.61 | v70.22,13.92 79.98,13.92 v80.47,14.4 | v82.06,14.4 82.41,14.75 82.41,15.17 J1.14 | v44.6,44.39 v44.6,46.67 44.6,50.14 U4.5 | v48.61,41.62 47.92,41.62 47.78,41.76 D11.2 | v48.89,36.36 47.23,36.36 45.29,38.3 45.29,39.13 45.5,39.33 46.47,39.33 47.02,38.78 47.71,38.78 R6.1
  Bottom 0.15: v3.81,89.61 3.81,89.96 v2.84,90.92 v2.84,97.44 | v4.36,86.08 4.36,86.01 v15.37,75 v15.37,54.57 | v82.06,14.4 v80.47,14.4 | v44.6,46.67 48.61,42.66 v48.61,41.62 48.89,41.34 v48.89,36.36 48.89,35.25 v70.22,13.92 | v16.2,43.49 20.64,43.49 21.54,44.39 v44.6,44.39
N$1
  Top 0.15: 121.95,39.68 123.2,39.68 123.27,39.61 IC1.3 | 121.95,39.68 120.84,39.68 D1.1 | 121.95,39.68 121.95,37.12 C1_BAT1.1 | 121.95,39.68 121.95,40.65 122.71,41.41 123.27,41.41 IC1.1 123.33,41.48 124.1,42.24 128.67,42.24 133.51,47.09 134.28,47.09 Q1.2
N$2
  Top 0.15: R1_BAT.1 120.91,49.86 121.12,49.86 121.74,49.24 122.64,49.24 123.75,50.34 126.31,50.34 126.8,49.86 127,49.86 MCP_73831.1
N$3
  Top 0.15: CHG_LED.C 120.98,51.66 120.98,51.11 122.16,49.93 R1_BAT.2
N$4
  Top 0.15: R2_BAT.2 124.58,47.78 124.58,49.65 124.44,49.79 MCP_73831.5
N$5
  Top 0.15: C_DELAY.1 52.91,102.35 52.91,102.49 51.59,103.81 IC2.5
N$6
  Top 0.15: R2-USB1.2 157.27,44.74 157.27,47.58 162.74,53.05 163.22,53.05 J2.A5
N$7  (via drill 0.3)
  Top 0.15: v151.45,46.81 150.9,46.26 150.9,46.12 R2-USB.1 | v162.32,55.68 162.67,56.02 163.22,56.02 J2.B5
  Bottom 0.15: v151.45,46.81 151.45,45.77 154.57,42.66 154.84,42.66 162.32,50.14 v162.32,55.68
N$8
  Top 0.15: C4.1 100.07,32.83 99.72,32.83 94.46,27.56 D4.1 94.32,27.56 87.6,34.28 85.25,34.28 D3.2
N$9
  Top 0.15: J1.5 86.98,15.23 86.98,16.41 88.57,18 92.31,18 EPD_C2.1
N$10
  Top 0.15: J1.24 77.42,15.23 77.42,18.21 77.01,18.63 EPD_C12.1
N$11
  Top 0.15: J1.4 87.46,15.23 87.46,16.48 88.5,17.52 89.47,17.52 89.96,17.04 91.48,17.04 91.89,17.45 93,17.45 93.56,18 EPD_C1.1
N$12
  Top 0.15: R_CAPACITOR.2 89.61,47.71 89.47,47.71 88.85,47.09 86.98,47.09 85.18,48.89 85.18,53.32 90.44,58.59 90.44,60.04 91.06,60.66 91.06,63.09 D7.1
N$13
  Top 0.15: J1.22 78.46,15.23 78.46,17.11 79.98,18.63 EPD_C10.1
N$15
  Top 0.15: J1.20 79.5,15.23 79.5,16.07 81.51,18.07 82.48,18.07 83.03,18.63 EPD_C8.1
N$16  (via drill 0.3)
  Top 0.15: J1.19 79.98,15.23 v79.98,15.93 79.98,16 80.68,16.69 81.58,16.69 81.92,17.04 v83.79,17.04 83.79,17.87 84.55,18.63 EPD_C7.1
N$17  (via drill 0.3)
  Top 0.15: v85.45,18 86.08,18.63 EPD_C6.1 | v81.92,16.41 80.81,16.41 80.47,16.07 80.47,15.23 J1.18
  Bottom 0.15: v85.45,18 83.52,18 v81.92,16.41
PREVGH  (via drill 0.3)
  Top 0.3: v94.39,28.32 94.39,32.48 D5.1 | v88.36,19.32 88.36,20.43 88.16,20.64 82.55,20.64 82.27,20.36 82.27,19.39 81.58,18.7 EPD_C9.1 81.44,18.56 78.94,16.07 78.94,15.23 J1.21
  Bottom 0.3: v94.39,28.32 94.39,26.94 88.36,20.91 v88.36,19.32
PREVGL  (via drill 0.3)
  Top 0.3: v79.22,19.32 78.53,18.63 EPD_C11.1 78.46,18.49 77.97,18 77.97,15.23 J1.23 | v92.24,24.03 94.39,24.03 97.85,27.49 D4.2
  Bottom 0.3: v79.22,19.32 v80.61,20.71 80.75,20.64 86.28,20.64 88.16,18.77 88.57,18.77 92.24,22.44 v92.24,24.03
RESE  (via drill 0.3)
  Top 0.15: Q3.2 70.43,17.8 70.43,19.67 72.23,21.47 R3.1 72.3,21.54 72.85,22.09 74.58,22.09 v75.14,21.54 75.14,20.15 73.82,18.84 73.82,16.69 | v87.53,14.4 87.88,14.75 87.88,15.17 J1.3 | 73.82,16.69 v74.24,16.69 | 73.82,16.69 v71.47,16.69
  Bottom 0.15: v87.53,14.4 85.59,14.4 85.11,13.92 77.01,13.92 v74.24,16.69
RESE'
  Top 0.15: SJ1.2 69.25,12.74 69.6,13.09 69.6,14.68 R2.2 69.67,14.75 70.84,15.93 70.84,19.53 71.47,20.15 72.23,20.15 R3.2
RESET  (via drill 0.3)
  Top 0.15: v46.4,105.12 46.81,105.12 48.06,103.88 48.75,103.88 IC2.1 | v10.25,49.24 v10.25,47.58 10.25,44.67 U2.3 | v18.84,105.33 20.77,107.27 C5.1 | RESET_BUTTON.4 22.3,108.72 22.99,108.03 v23.34,108.03 23.41,108.03 23.89,107.55 24.52,107.55 25.69,108.72 RESET_BUTTON.3 25.76,108.72 25.83,108.65 27.42,108.65 R_RESET.2
  Bottom 0.15: v46.4,105.12 v42.94,108.58 25.14,108.58 24.1,107.55 23.89,107.55 23.41,108.03 v23.34,108.03 20.64,105.33 v18.84,105.33 18.84,94.39 15.44,91 8.66,91 3.88,86.22 3.88,85.94 10.25,79.57 v10.25,49.24
RTC_RST
  Top 0.15: U2.16 22.99,62.05 22.99,61.77 23.68,61.08 43.21,61.08 43.42,61.29 84,61.29 85.66,59.62 85.66,59.28 U3.4
RX
  Top 0.15: U2.24 12.81,62.12 12.81,63.85 13.71,64.75 RX.TP
SCK  (via drill 0.3)
  Top 0.15: v14.06,41.76 13.09,40.79 SCK.TP | v6.72,91 5.96,91 5.61,90.65 J4.P5 | v14.06,43.49 14.06,44.6 U2.6 13.99,44.67 13.99,44.87 11.01,47.85 11.01,49.1 9.28,50.83 v9.28,51.59 | v47.02,42.52 48.82,42.52 49.51,41.83 D10.2 | v45.36,45.29 45.36,50.34 44.6,51.11 44.6,51.38 U4.6 | J1.13 82.96,15.17 82.96,14.75 83.1,14.61 v83.1,14.4 82.68,14.4 79.64,11.36 67.31,11.36 51.94,26.73 51.94,38.43 51.59,38.78 49.72,38.78 49.58,38.64 R7.1 49.51,38.57 v48.41,37.46
  Bottom 0.15: v6.72,91 6.72,89.47 3.6,86.36 3.6,65.51 9.28,59.83 v9.28,51.59 | v14.06,41.76 v14.06,43.49 15.58,43.49 16.97,44.87 44.74,44.87 45.36,44.25 45.36,44.04 45.7,43.7 46.05,43.7 46.5,44.15 | 46.5,44.15 47.02,43.63 v47.02,42.52 47.02,38.85 v48.41,37.46 | 46.5,44.15 v45.36,45.29
SCL  (via drill 0.3)
  Top 0.15: v141.62,51.8 141.62,52.49 v140.51,53.6 139.47,53.6 U1.7 | v164.05,20.29 164.26,20.29 164.75,20.77 165.02,20.77 J3.4 | v157.82,11.01 157.54,11.01 155.95,12.6 SENSOR2.4 155.88,12.67 155.88,12.88 v155.26,13.5 155.26,13.57 154.84,13.99 152.97,13.99 151.8,12.81 151.8,6.09 152.28,5.61 156.09,5.61 156.64,6.16 156.92,6.16 R2-PINH.1 | v20.43,59.28 17.87,61.84 17.87,62.05 U2.20 | v88.43,51.38 89.47,50.34 89.47,50 U3.16 | v79.98,51.11 v46.26,51.11 46.26,51.18 45.77,51.66 v45.77,52.35
  Bottom 0.15: 163.29,20.29 162.04,20.29 v155.26,13.5 | 163.29,20.29 v164.05,20.29 | v141.62,51.8 141.62,42.31 161.77,22.16 162.94,22.16 163.29,21.81 163.29,20.29 | v79.98,51.11 80.26,51.38 v88.43,51.38 100,51.38 102.21,53.6 v140.51,53.6 | v20.43,59.28 21.05,59.28 22.02,58.31 25.07,58.31 25.14,58.38 40.72,58.38 45.15,53.95 45.36,53.95 45.77,53.53 v45.77,52.35
SDA  (via drill 0.3)
  Top 0.15: U1.8 139.47,54.08 v140.16,54.08 140.85,54.08 v143.14,51.8 | J3.3 165.02,19.8 163.91,19.8 162.81,20.91 v162.81,21.68 162.81,21.74 v143.14,41.41 | SENSOR2.3 155.05,12.67 155.05,12.88 154.63,13.3 v154.63,13.5 154.57,13.5 154.43,13.64 153.04,13.64 152.07,12.67 152.07,7.06 152.77,6.37 152.77,6.23 R1_PINH.1 | v21.68,59.28 19.18,61.77 19.18,62.05 U2.19 | v66.06,59.97 v67.52,58.52 | v86.01,52.08 v87.12,52.08 87.12,51.45 88.22,50.34 88.22,50 U3.15
  Bottom 0.15: v143.14,51.8 v143.14,41.41 | v162.81,21.68 v159.41,18.28 159.34,18.28 154.63,13.57 v154.63,13.5 | v67.52,58.52 79.57,58.52 v86.01,52.08 | v21.68,59.28 22.64,59.28 22.78,59.14 23.06,59.14 23.68,59.76 65.86,59.76 v66.06,59.97 | v140.16,54.08 102.28,54.08 100.27,52.08 v87.12,52.08
SRC  (via drill 0.3)
  Top 0.15: v95.36,32.48 97.85,32.48 D5.2 97.92,32.55 99.51,34.14 100.07,34.14 C4.2 | v84.48,32.48 81.16,29.15 L1.1 81.09,29.22 75.69,29.22 v74.03,27.56 | v69.73,23.27 69.73,19.88 Q3.3
  Bottom 0.15: v69.73,23.27 v74.03,27.56 | v84.48,32.48 v95.36,32.48
SS_SD  (via drill 0.3)
  Top 0.15: v11.49,45.7 11.49,44.67 U2.4 | D8.2 14.06,97.71 13.37,98.4 10.94,98.4 R10.1 10.94,98.33 10.94,83.17 v10.53,82.75 | v6.44,85.45 6.44,85.66 6.58,85.8 6.58,86.7 6.03,87.25 J4.P2
  Bottom 0.15: v11.49,45.7 v11.49,49.17 11.49,49.79 10.87,50.41 10.87,50.69 14.27,54.08 15.51,54.08 15.86,54.43 15.86,60.59 15.65,60.8 15.65,74.65 15.86,74.86 15.86,77.35 10.53,82.68 v10.53,82.75 9.14,82.75 v6.44,85.45
TX
  Top 0.15: U2.25 11.49,62.12 11.49,64.75 TX.TP
USB_D+  (via drill 0.3)
  Top 0.15: v151.8,51.04 153.25,51.04 D2.1 | v36.49,60.25 36.49,56.78 v37.53,55.75 | v32.41,50.62 26.45,44.67 24.24,44.67 U2.14
  Bottom 0.15: v37.53,55.75 v32.41,50.62 | v151.8,51.04 150.48,51.04 140.02,61.49 37.74,61.49 v36.49,60.25
USB_D-  (via drill 0.3)
  Top 0.15: v28.25,50.14 22.99,44.87 22.99,44.67 U2.13 | v152.21,49.1 153.25,49.1 D2.3 | v48.13,52.35 v57.96,52.35
  Bottom 0.15: v48.13,52.35 46.4,50.62 46.33,50.62 v45.84,50.14 45.77,50.14 45.29,50.62 37.81,50.62 37.33,50.14 v28.25,50.14 | v152.21,49.1 152,49.1 147.99,53.12 102.14,53.12 99.65,50.62 59.69,50.62 v57.96,52.35
VBAT
  Top 0.15: MCP_73831.3 127.07,51.8 127.42,52.15 130.26,52.15 C2_BAT.1 130.33,52.22 133.31,49.24 Q1.3 133.38,49.31 137.12,53.05 137.39,53.05 U1.3 137.46,53.12 137.46,53.53 U1.2 137.39,53.6 137.12,53.6 136.84,53.88 136.84,54.29 143.97,61.42 143.97,64.33 V_BAT.TP
VBUS  (via drill 0.3)
  Top 0.3: MCP_73831.4 124.37,51.73 122.43,51.73 CHG_LED.A 122.3,51.8 121.67,52.42 118.69,52.42 118,51.73 C1_BAT.1 118.07,51.59 118.07,42.66 119.11,41.62 R1_PWRUSB.2 119.18,41.48 120.5,41.48 120.77,41.76 D1.2 120.91,41.83 121.19,42.1 123.2,42.1 128.18,47.09 132.34,47.09 Q1.1 132.54,47.16 133.03,47.16 137.12,51.24 146.46,51.24 147.36,52.15 147.5,52.22 | v154.7,43.14 154.7,40.65 PFMF.050.1.2 | C4_USB.1 157.47,52.42 157.47,51.31 156.23,50.07 155.95,50.07 D2.5 155.74,50 155.4,50 154.91,49.51 154.91,49.38 154.08,48.54 v154.08,48.34 154.01,48.2 153.6,47.78 153.6,46.33 152.63,45.36 150.41,45.36 150.2,45.57 150.2,46.67 150.48,46.95 150.48,50 C5_USB.1 150.34,50.07 149.65,50.07 147.5,52.22 | 147.5,52.22 147.5,64.33 V_BUS.TP
  Bottom 0.3: v154.7,43.14 154.7,47.71 v154.08,48.34
VRTC
  Top 0.3: C10_SUPERCAP.2 96.47,48.48 96.12,48.82 94.04,48.82 C8.1 93.83,48.82 90.09,48.82 89.82,48.54 88.85,48.54 88.5,48.2 R_CAPACITOR.1 88.36,47.78 88.36,48.13 87.05,49.44 87.05,49.93 U3.14
VUSB
  Top 0.3: J2.A4 163.29,51.8 163.29,52.01 J2.B9 163.43,52.08 163.91,52.08 164.3,52.46 | J2.A9 163.29,56.78 163.29,56.58 J2.B4 163.43,56.51 163.98,56.51 164.75,55.75 164.75,52.91 164.3,52.46 | 164.3,52.46 165.16,51.59 165.16,47.99 160.8,43.63 154.98,43.63 154.91,43.7 153.25,43.7 150.2,40.65 PFMF.050.1.1